# Altium PCB Teletupsud-PCB.PcbDoc
Units mm, origin at the board's own origin, x right, y up, seen from the top; angles counter-clockwise.
Board outline 47.5 x 47 mm, 4 copper layers (Top Layer, GND, GND2, Bottom Layer), stack 0.551 mm thick; 64 components, 51 nets, 259 pads, 138 vias.
Unrouted connection lines stored in the file: 9.
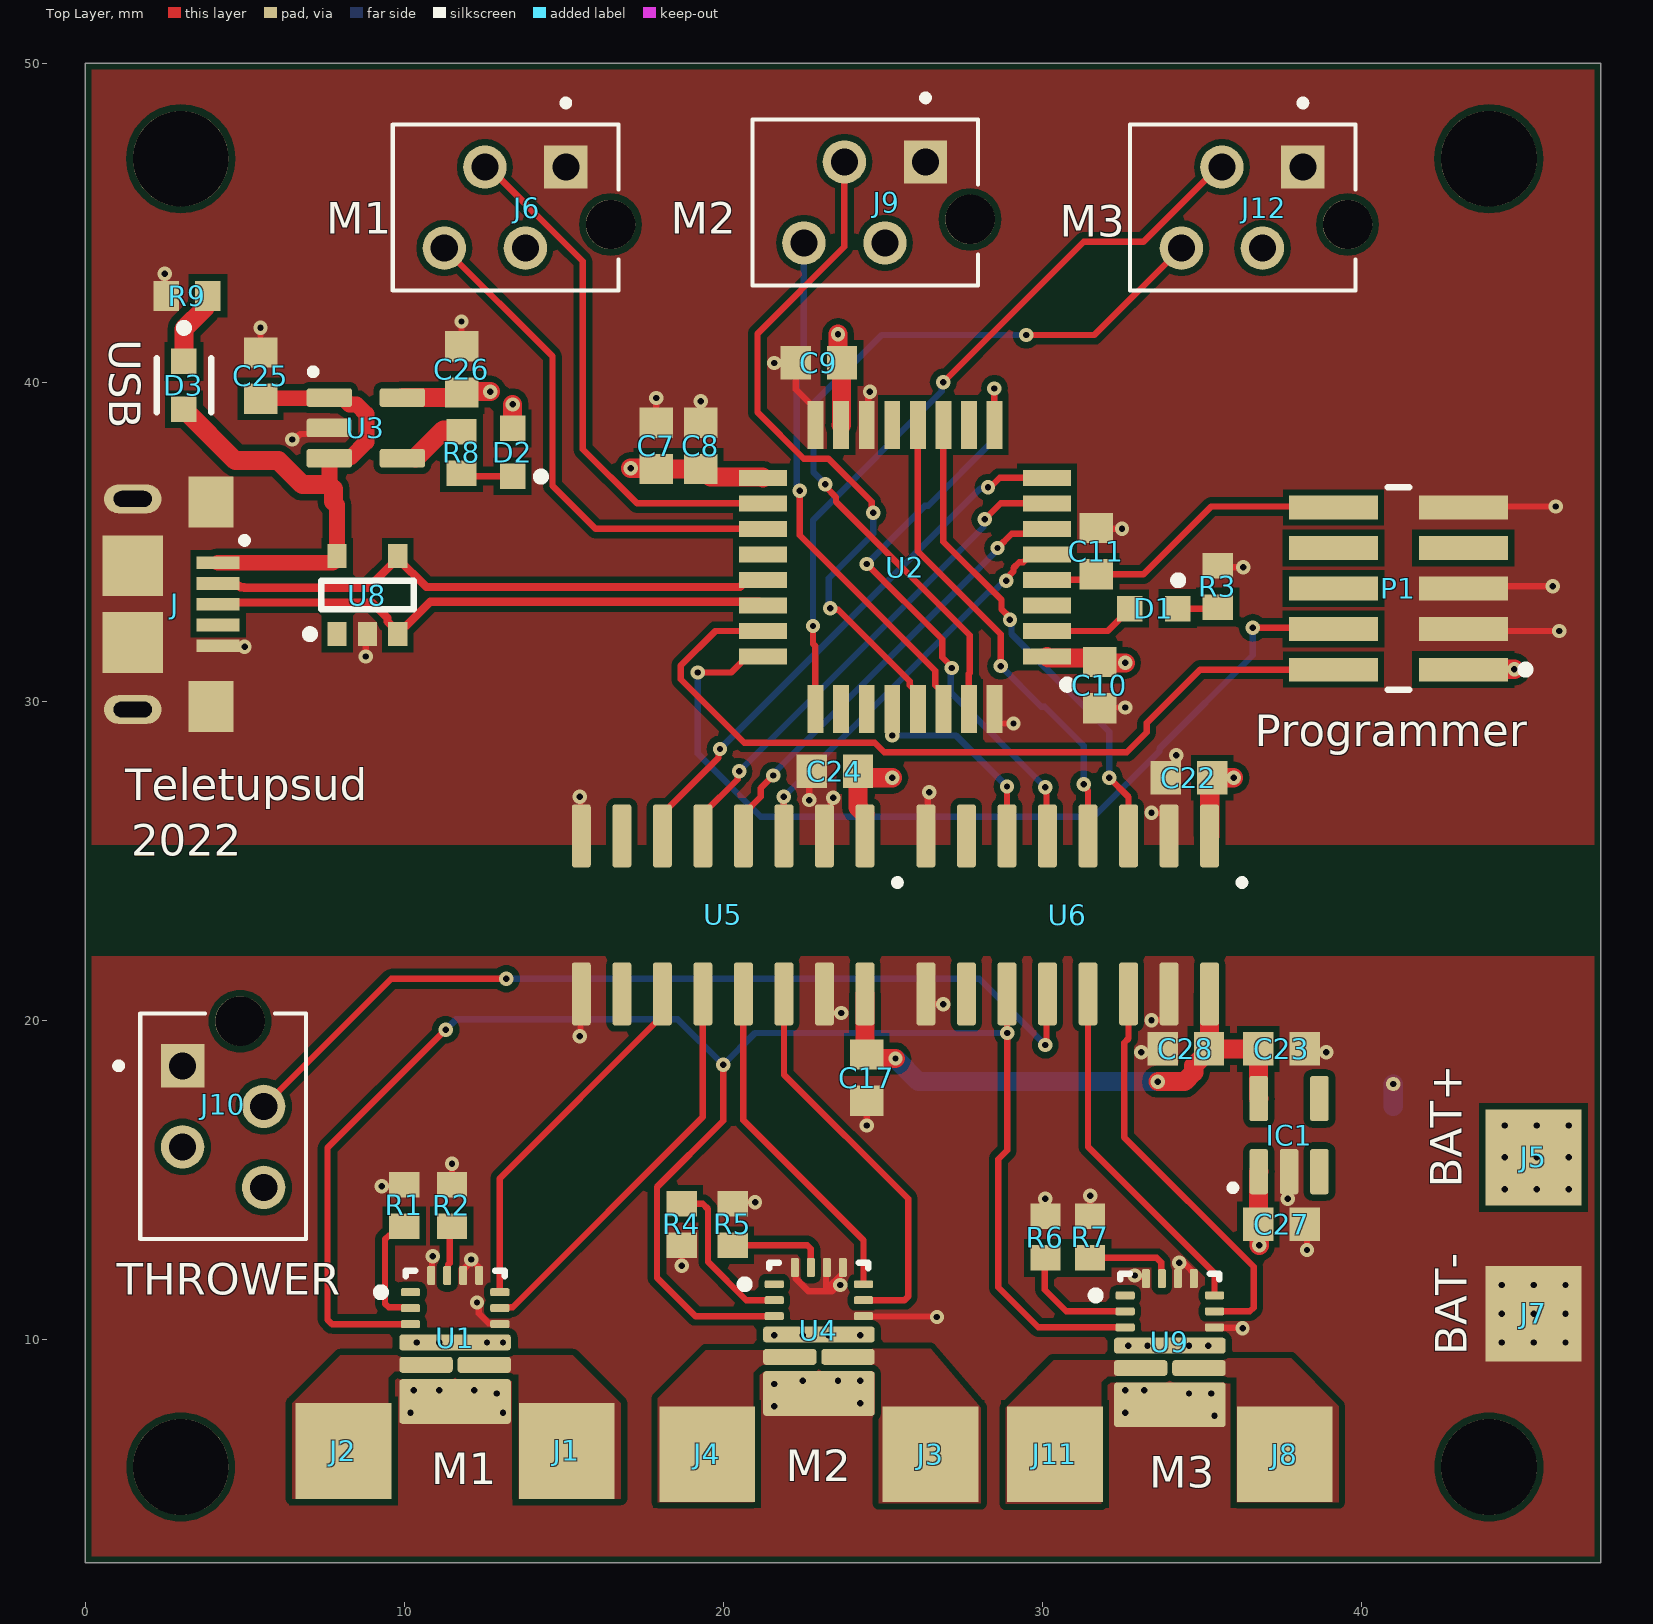
[diagram p0: Top Layer view]
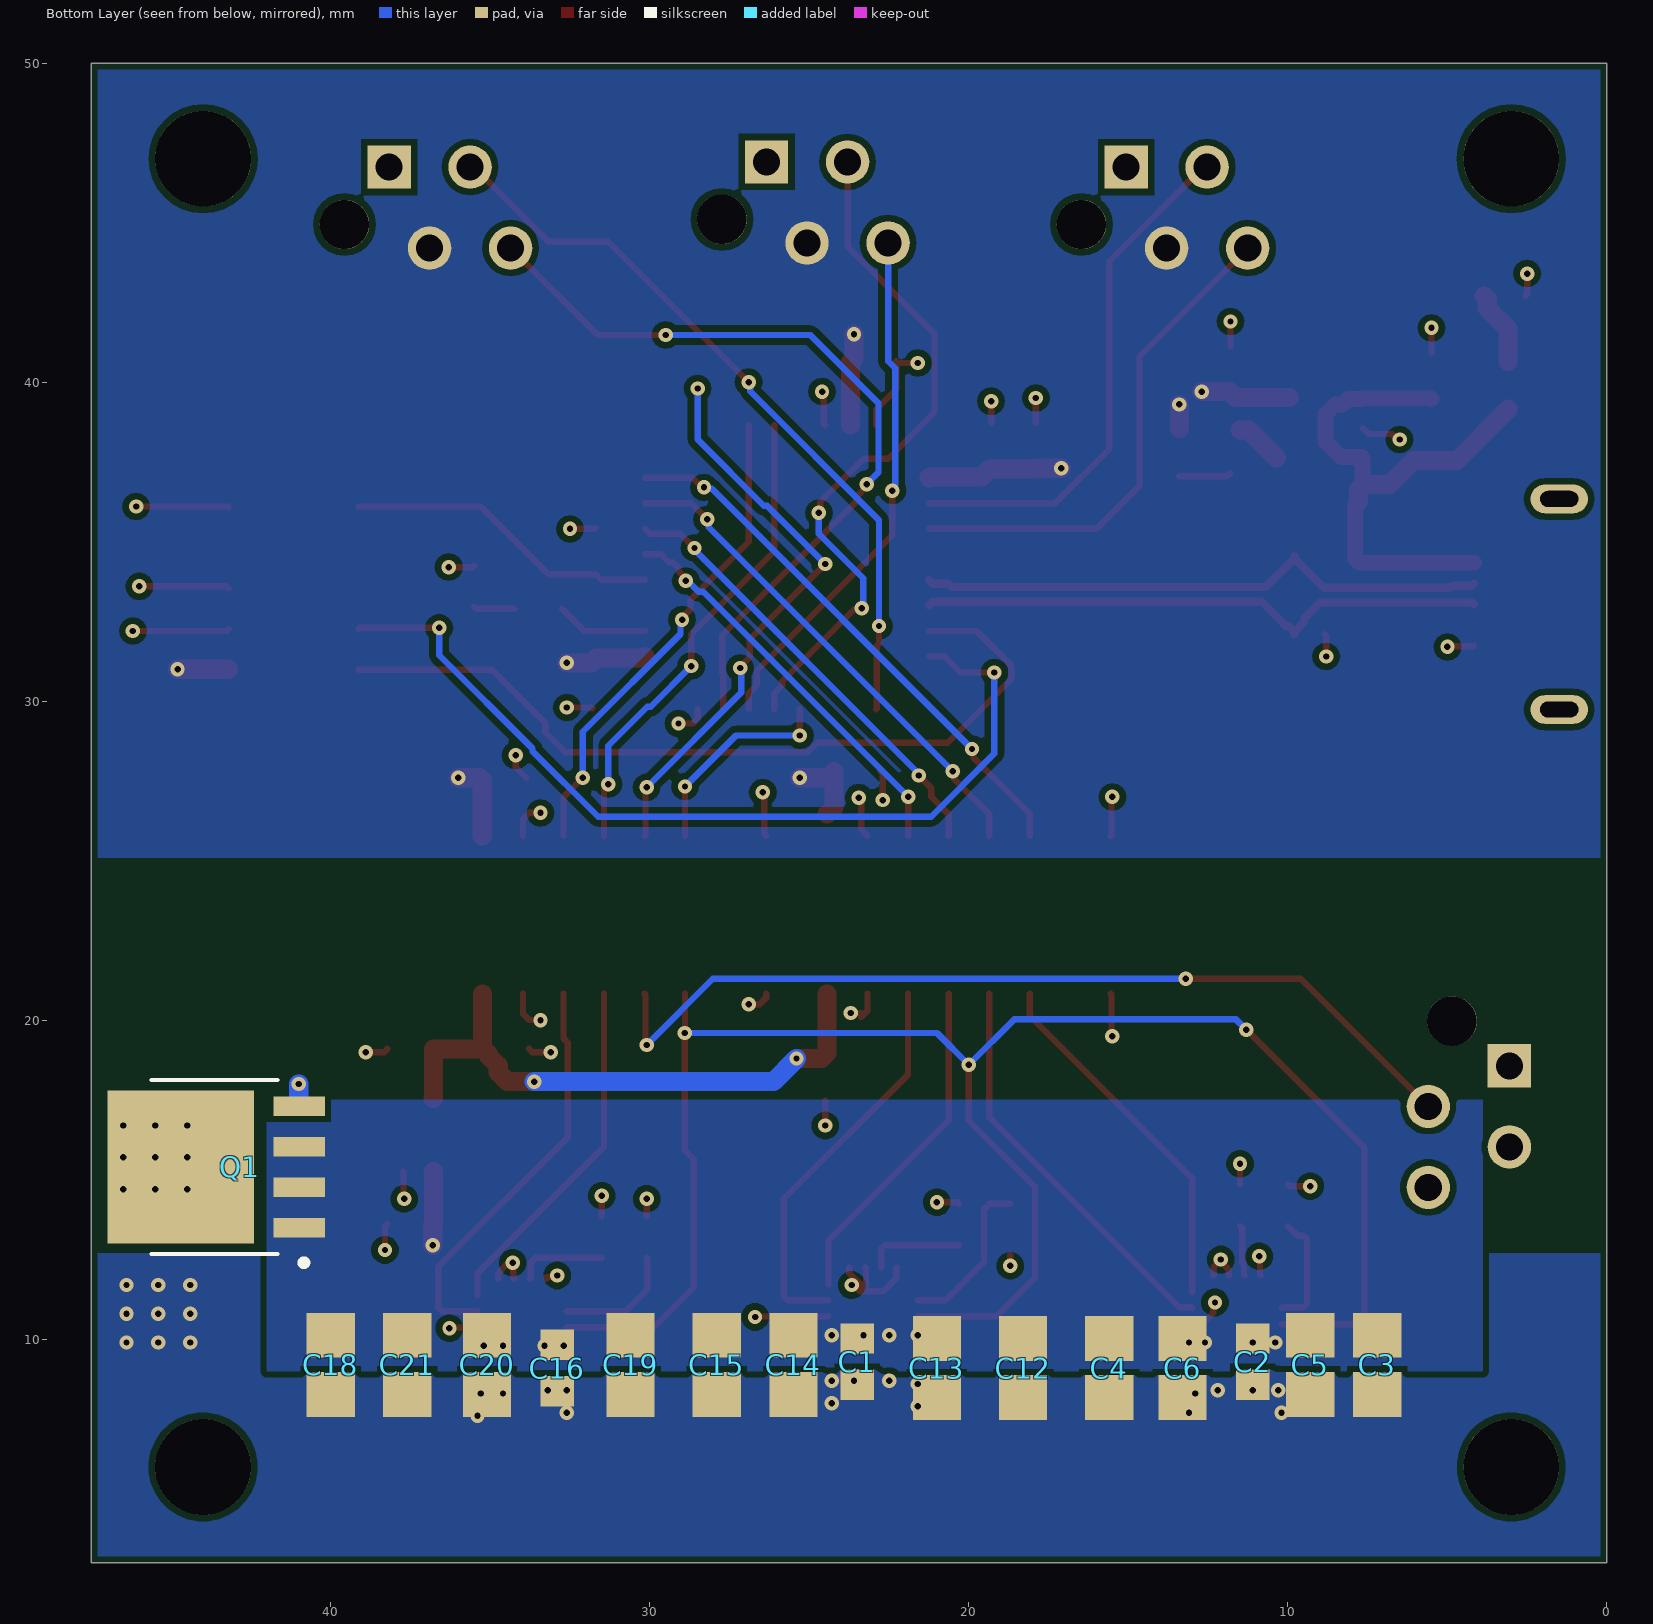
[diagram p1: Bottom Layer view, seen from below]
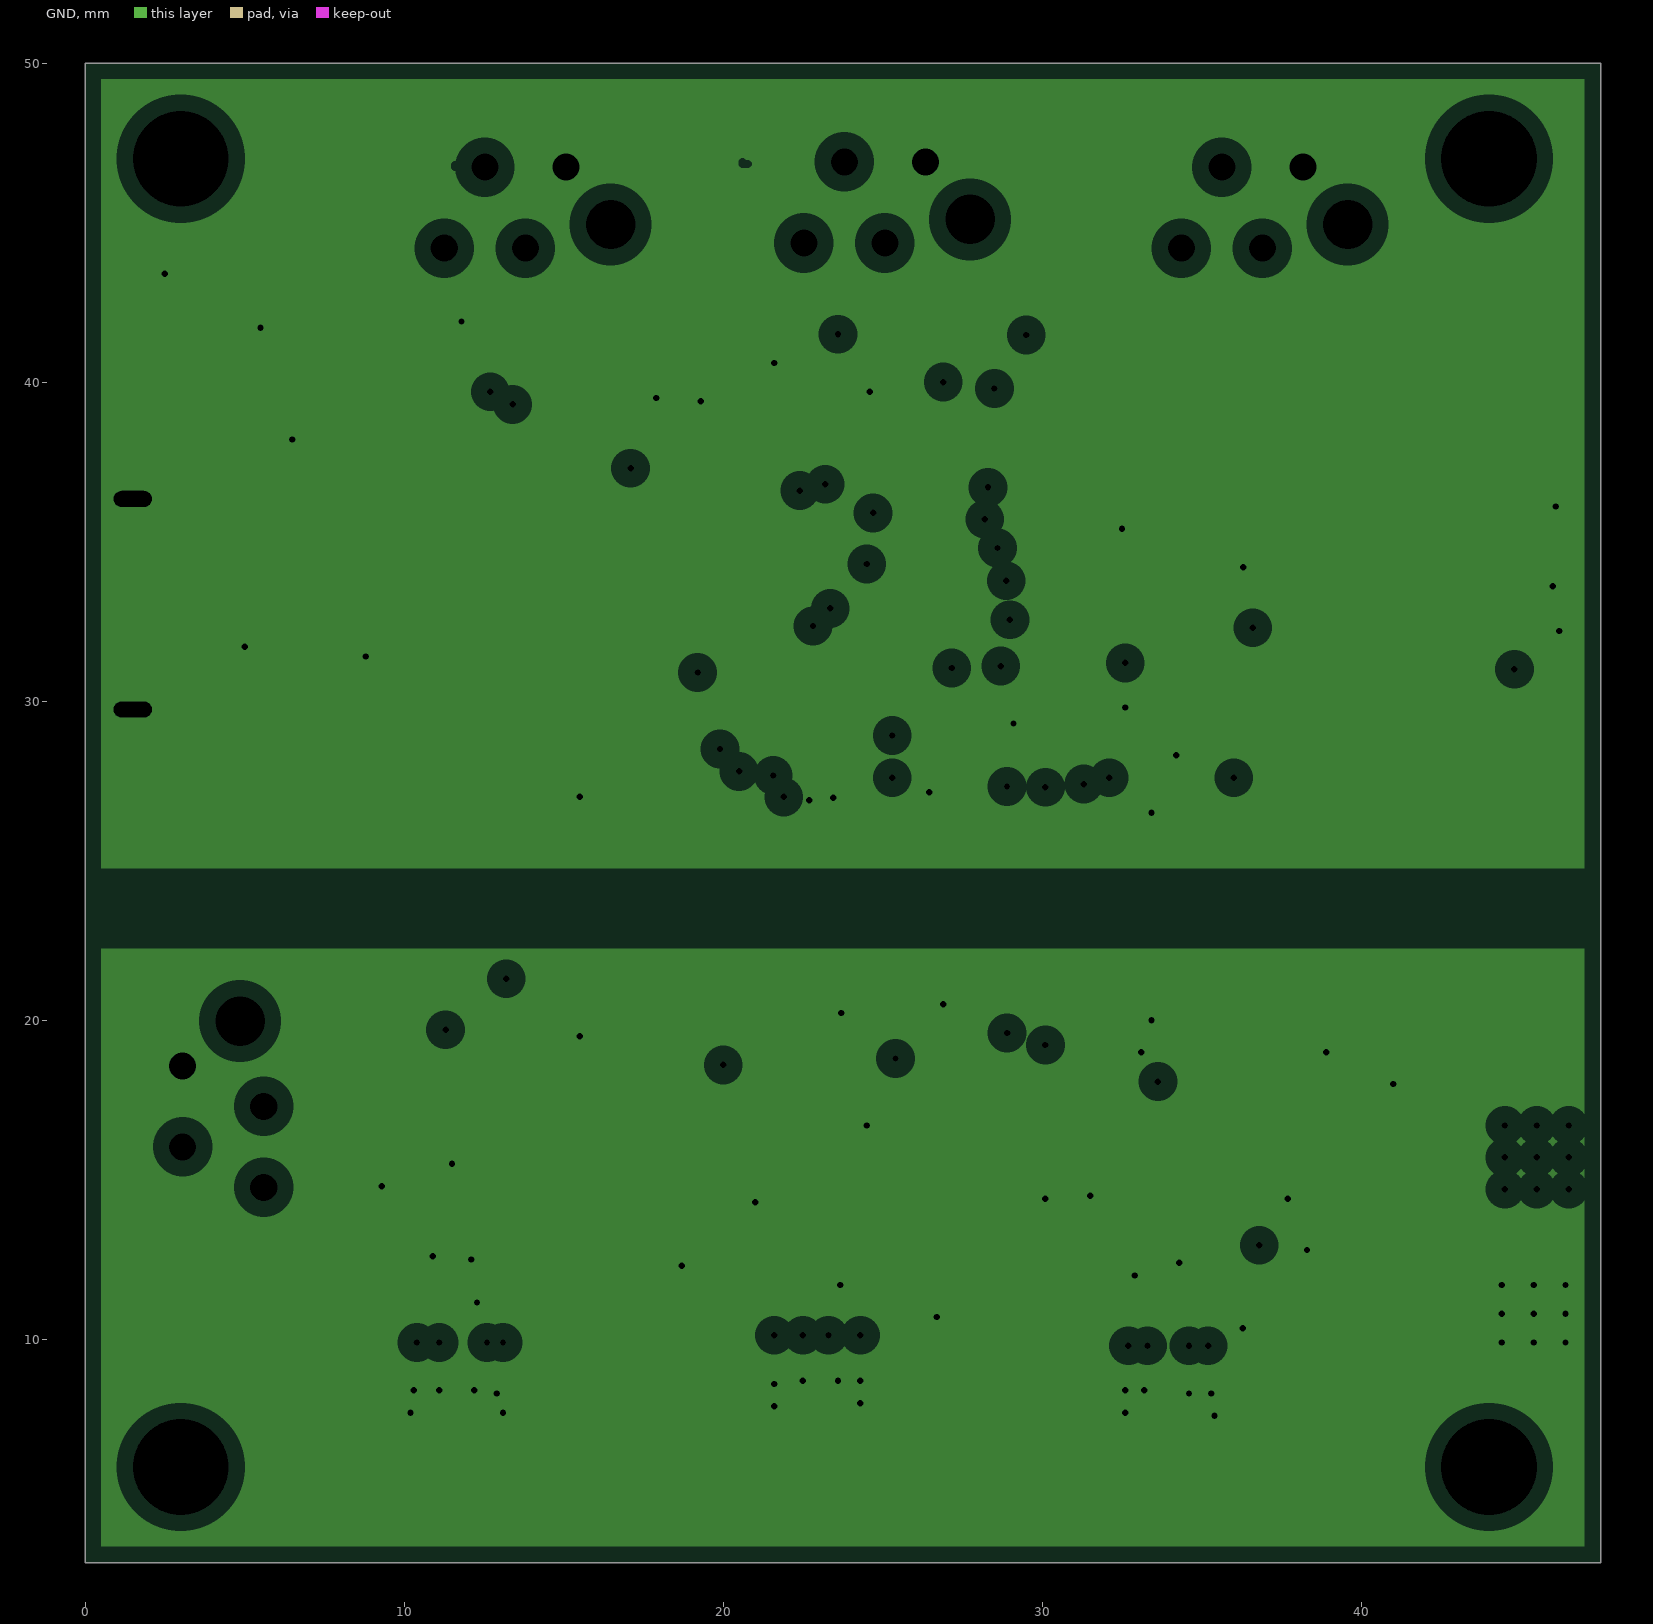
[diagram p2: GND, clearances drawn from the general rule]
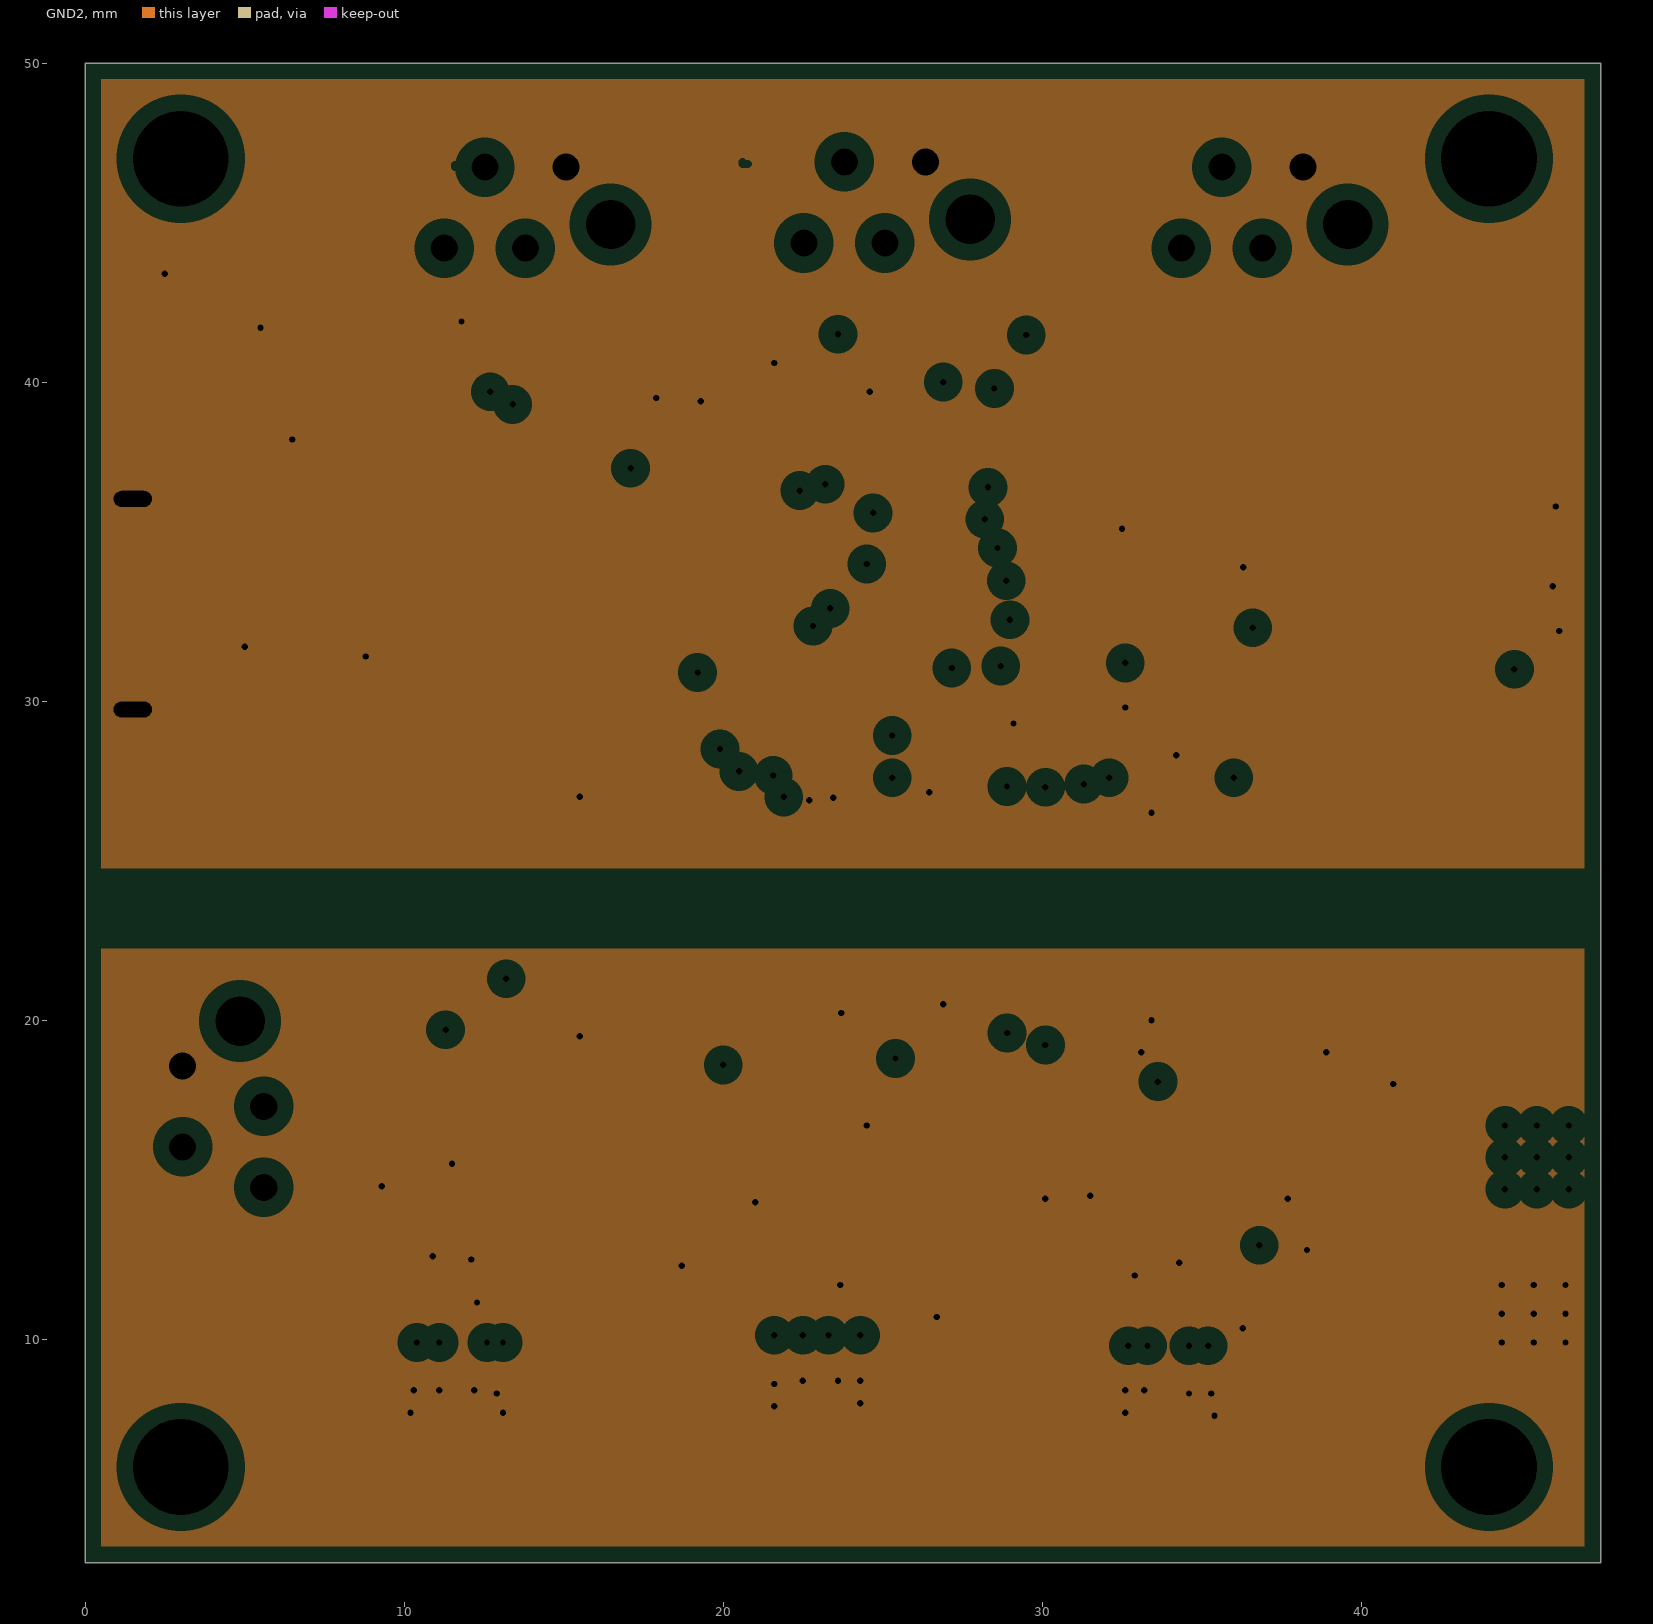
[diagram p3: GND2, clearances drawn from the general rule]
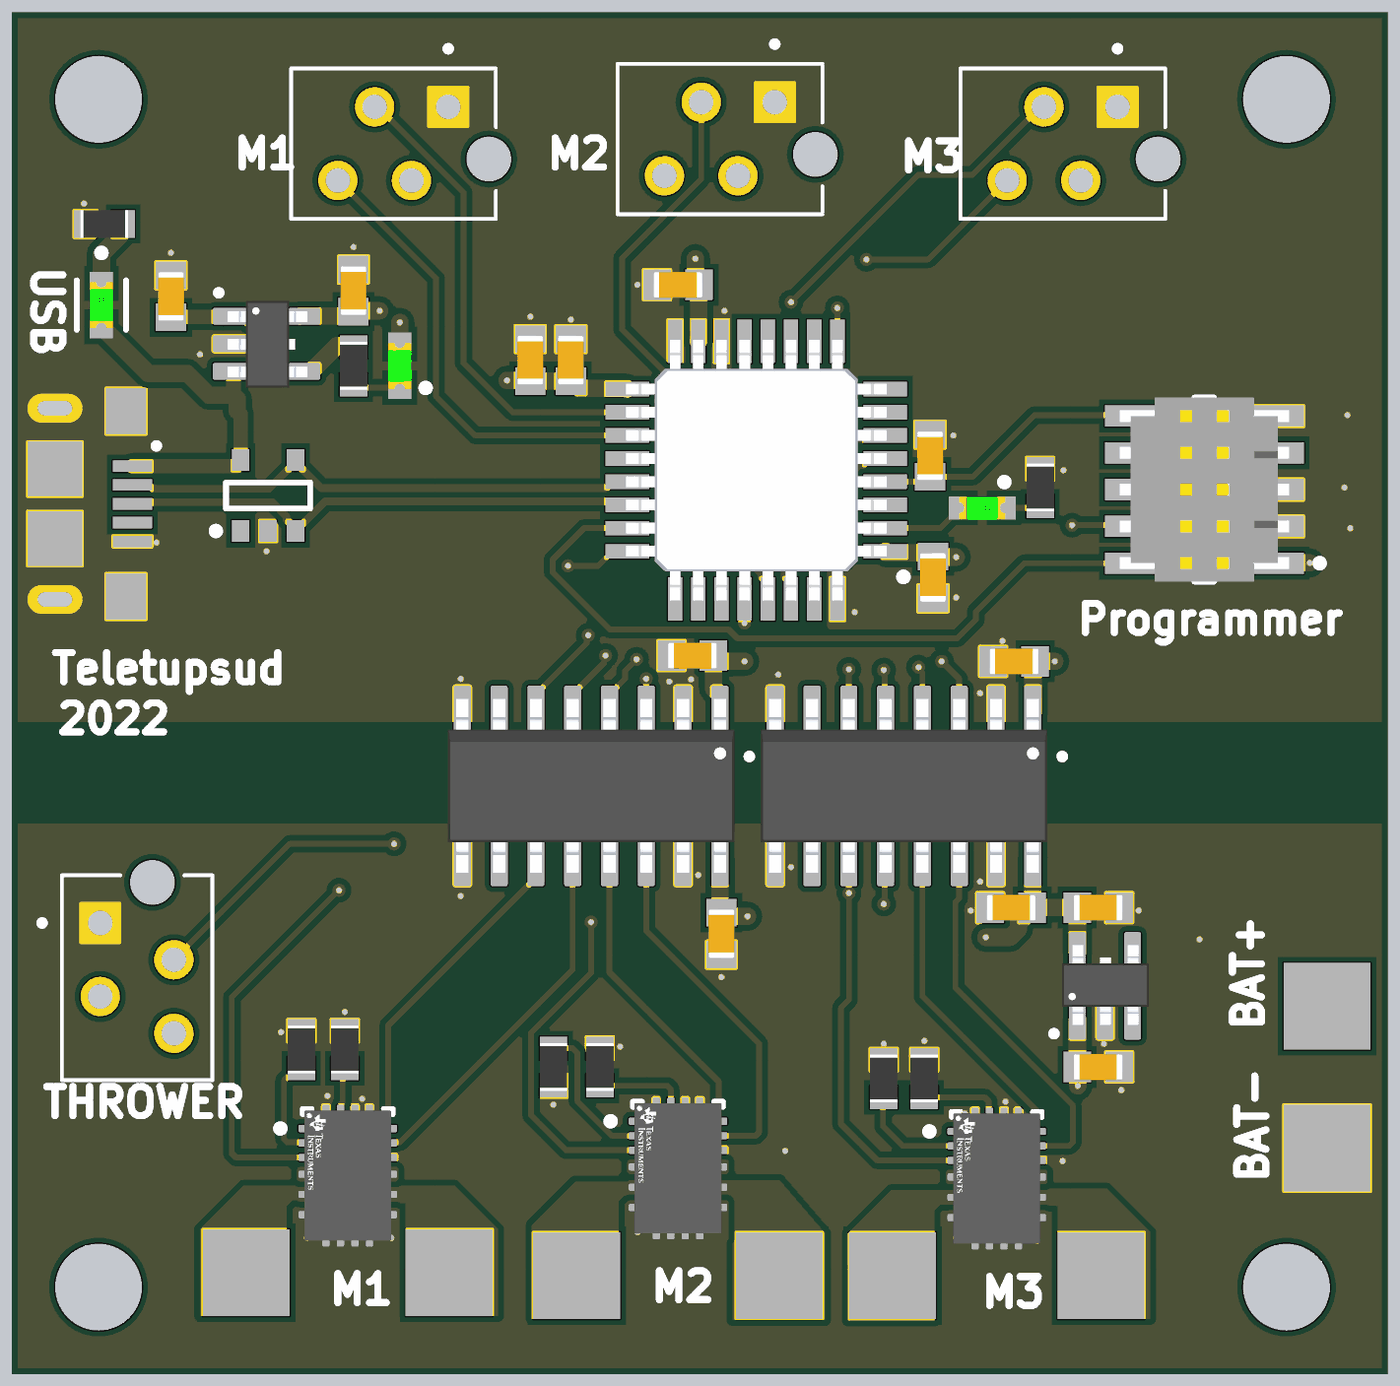
[diagram p4: 3D render of the assembled board from above, using the file's embedded part models]
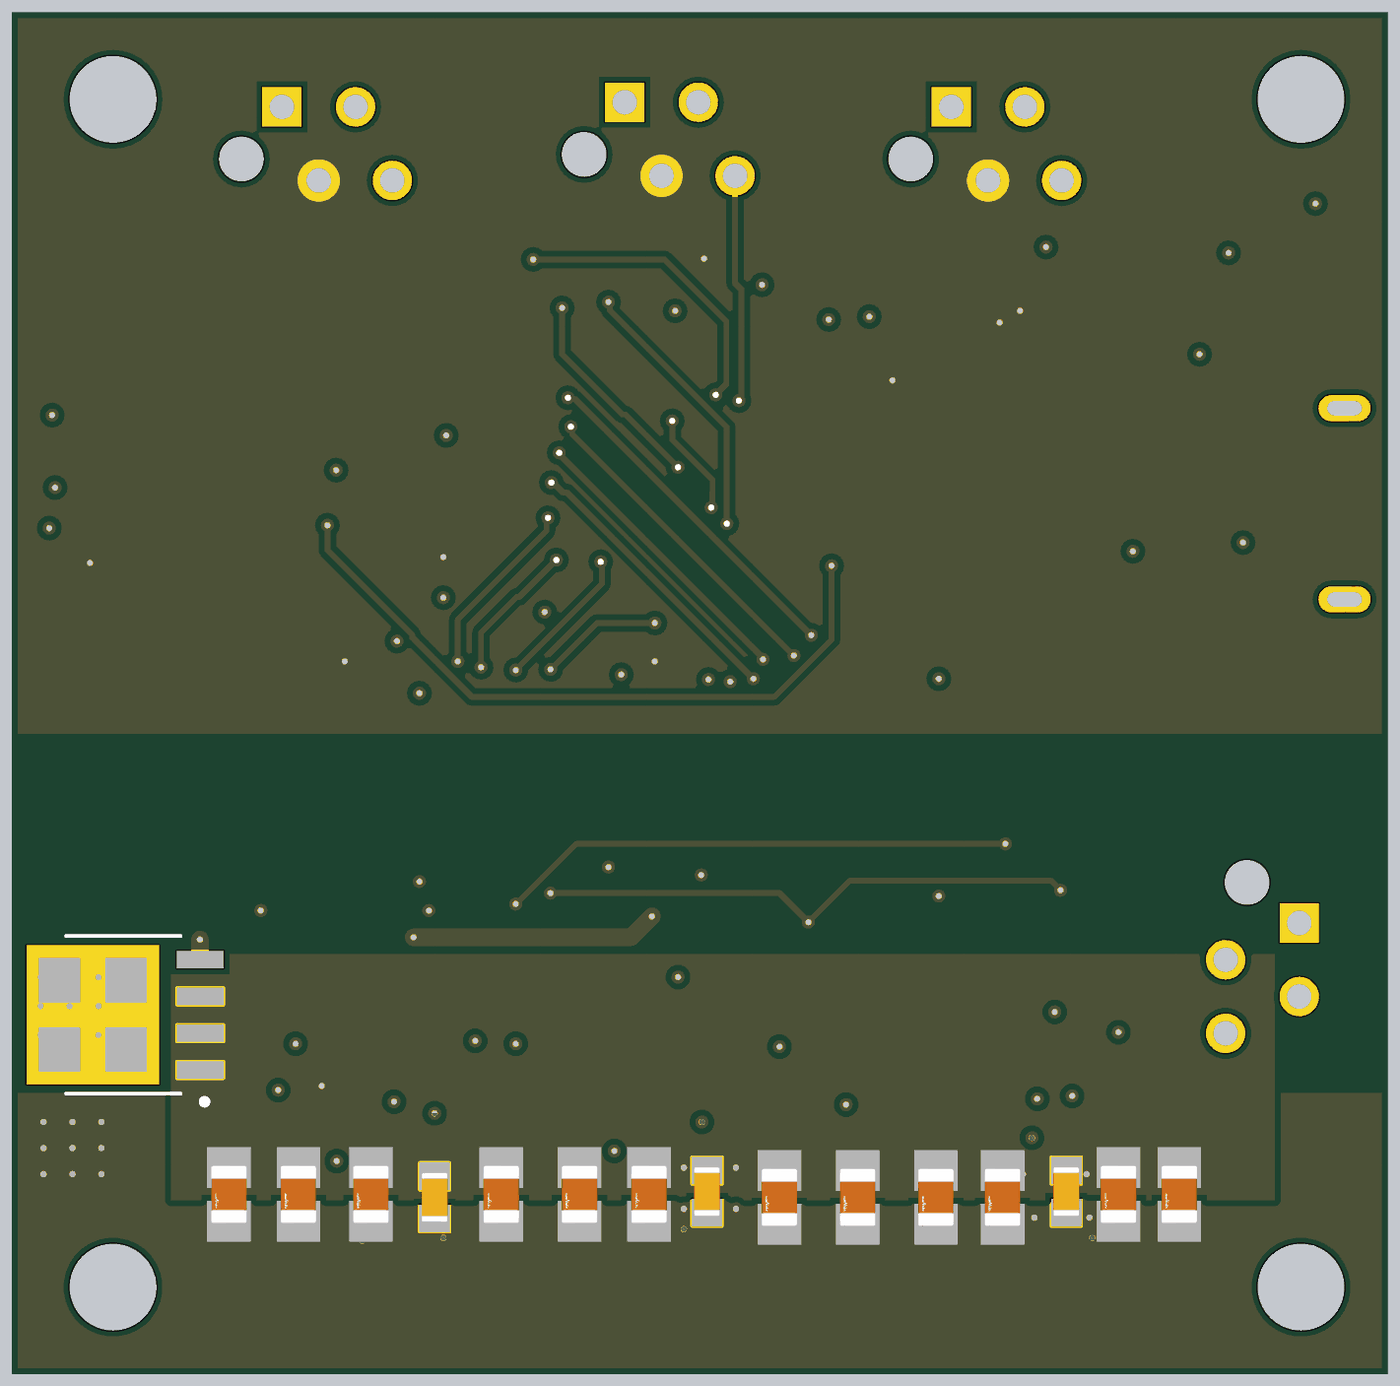
[diagram p5: 3D render of the assembled board from below, using the file's embedded part models]

## Layer stack, top to bottom
Top Solder: solder mask 0.0102, Solder Resist, Dk 3.5
Top Layer: signal copper 0.0356
Dielectric 2: prepreg 0.0711, PP-006, Dk 4.1
GND: plane copper 0.009, net (Multiple Nets)
Dielectric 1: dielectric 0.32, FR-4, Dk 4.8
GND2: plane copper 0.009, net (Multiple Nets)
Dielectric 3: prepreg 0.0711, PP-006, Dk 4.1
Bottom Layer: signal copper 0.0356
Bottom Solder: solder mask 0.0102, Solder Resist, Dk 3.5

## Board outline
0,3 47.5,3 47.5,50 0,50

## Design rules (kind name [scope] priority, off if disabled: settings)
BoardOutlineClearance [All] p1: gap=0.2 ignorepadtopadclearanceinfootprint=FALSE except(0: Arc-SplitContinuation Track-SplitContinuation SMDPad-SplitContinuation THPad-SplitContinuation Via-SplitContinuation Fill-SplitContinuation Poly-SplitContinuation Region-SplitContinuation Text-SplitContinuation)
Clearance [All] p1: gap=0.2 ignorepadtopadclearanceinfootprint=TRUE except(0: Arc-Hole Track-Hole SMDPad-Hole THPad-Hole Via-Hole Fill-Hole Poly-Hole Region-Hole Text-Hole)
ComponentClearance [All] p1: gap=0.1 collisioncheckmode=3 verticalgap=0.1 showdistances=FALSE
DiffPairsRouting DiffPairsRoutingUSB [All] p1: maxlimit=0.2 minlimit=0.2 mostfreqgap=0.2 toplayer_minwidth=0.15 toplayer_maxwidth=0.26 toplayer_prefwidth=0.26 bottomlayer_minwidth=0.15 bottomlayer_maxwidth=0.26 bottomlayer_prefwidth=0.26 maxuncoupledlength=12.7
DiffPairsRouting [All] p2: maxlimit=0.254 minlimit=0.254 mostfreqgap=0.254 toplayer_minwidth=0.381 toplayer_maxwidth=0.381 toplayer_prefwidth=0.381 bottomlayer_minwidth=0.381 bottomlayer_maxwidth=0.381 bottomlayer_prefwidth=0.381 maxuncoupledlength=12.7
HoleSize [All] p1: absolutevalues=TRUE maxlimit=5 minlimit=0.2 maxpercent=80.000 minpercent=20.000
MinimumSolderMaskSliver [All] p1: minsoldermaskwidth=0.1
PlaneClearance [All] p1: clearance=0.508
PlaneConnect [All] p1: planeconnectstyle=Direct reliefexpansion=0.508 reliefentries=4 reliefconductorwidth=0.254 reliefairgap=0.254
PolygonConnect [All] p1: connectstyle=Direct reliefconductorwidth=0.254 reliefentries=4 polygonreliefangle="90 Angle" airgapwidth=0.254
RoutingVias [All] p1: holewidth=0.2 width=0.45 viastyle="Through Hole" minholewidth=0.2 minwidth=0.45 maxholewidth=3 maxwidth=5
SilkToSilkClearance [All] p1: silktosilkclearance=0.2
SilkToSolderMaskClearance [All] p1: minsilkscreentomaskgap=0.2 clearancetoexposedcopper=TRUE
SolderMaskExpansion SolderMaskExpansionVia [IsVia] p1: expansion=0.102 istentingtop=TRUE
SolderMaskExpansion [All] p2: expansion=0.05 istentingtop=FALSE
Width [All] p1: maxlimit=3 minlimit=0.1 preferedwidth=0.254 minimp=50.000000 maximp=50.000000 favimp=50.000000
22 further rules are at their usual default settings.

## Classes and differential pairs
differential pair class USB: USB_D
differential pair USB_D: +USB_D_P -USB_D_N

## Components (designator, comment, footprint, x,y, rotation, side; value= is the part's Value field where it differs from the comment)
C1 "0.1uF" CAPC1608X90X35ML10T15 23.5,9.3 r90 bottom
C2 "0.1uF" CAPC1608X90X35ML10T15 11.1,9.3 r90 bottom
C3 "10uF" FP-GRM21B-0_15-IPC_A 7.2,9.2 r270 bottom
C4 "10uF" FP-GRM21B-0_15-IPC_A 15.6,9.1 r270 bottom
C5 "10uF" FP-GRM21B-0_15-IPC_A 9.3,9.2 r270 bottom
C6 "10uF" FP-GRM21B-0_15-IPC_A 13.3,9.1 r270 bottom
C7 "4.7uF" CAPC1608X90X35ML10T15 17.9,38 r270 top
C8 "100nF" CAPC1608X90X35ML10T15 19.3,38 r270 top
C9 "100nF" CAPC1608X90X35ML10T15 23,40.6 r0 top
C10 "100nF" CAPC1608X90X35ML10T15 31.8,30.5 r90 top
C11 "100nF" CAPC1608X90X35ML10T15 31.7,34.7 r270 top
C12 "10uF" FP-GRM21B-0_15-IPC_A 18.3,9.1 r270 bottom
C13 "10uF" FP-GRM21B-0_15-IPC_A 21,9.1 r270 bottom
C14 "10uF" FP-GRM21B-0_15-IPC_A 25.5,9.2 r270 bottom
C15 "10uF" FP-GRM21B-0_15-IPC_A 27.9,9.2 r270 bottom
C16 "0.1uF" CAPC1608X90X35ML10T15 32.9,9.1 r90 bottom
C17 "100nF" CAPC1608X90X35ML10T15 24.5,18.2 r90 top
C18 "10uF" FP-GRM21B-0_15-IPC_A 40,9.2 r270 bottom
C19 "10uF" FP-GRM21B-0_15-IPC_A 30.6,9.2 r270 bottom
C20 "10uF" FP-GRM21B-0_15-IPC_A 35.1,9.2 r270 bottom
C21 "10uF" FP-GRM21B-0_15-IPC_A 37.6,9.2 r270 bottom
C22 "100nF" CAPC1608X90X35ML10T15 34.6,27.6 r0 top
C23 "100nF" CAPC1608X90X35ML10T15 37.5,19.1 r180 top
C24 "100nF" CAPC1608X90X35ML10T15 23.5,27.8 r0 top
C25 "4.7uF" CAPC1608X90X35ML10T15 5.5,40.2 r270 top
C26 "4.7uF" CAPC1608X90X35ML10T15 11.8,40.4 r270 top
C27 "1uF" CAPC1608X90X35ML10T15 37.5,13.6 r180 top
C28 "1uF" CAPC1608X90X35ML10T15 34.5,19.1 r0 top
D1 "LTST-C190GKT" FP-LTST-C190GKT-MFG 33.5,32.9 r180 top
D2 "LTST-C190GKT" FP-LTST-C190GKT-MFG 13.4,37.8 r90 top
D3 "LTST-C190GKT" FP-LTST-C190GKT-MFG 3.1,39.9 r270 top
IC1 "NCV8730ASN500T1G" SOP95P275X110-5N 37.5,16.4 r90 top
J "10118193-0001LF" FCI_10118193-0001LF 1.496,33.039 r270 top
J1 "Current connection" "New footprint 1"#1 15.1,6.5 r0 top
J2 "Current connection" "New footprint 1"#1 8.1,6.5 r0 top
J3 "Current connection" "New footprint 1"#1 26.5,6.4 r0 top
J4 "Current connection" "New footprint 1"#1 19.5,6.4 r0 top
J5 "Current connection" "New footprint 1"#1 45.4,15.7 r90 top
J6 "7-215079-4" TE_7-215079-4 15.07,46.74 r0 top
J7 "Current connection" "New footprint 1"#1 45.4,10.8 r0 top
J8 "Current connection" "New footprint 1"#2 37.4,6.5 r0 top
J9 "7-215079-4" TE_7-215079-4 26.34,46.9 r0 top
J10 "7-215079-4" TE_7-215079-4 3.06,18.57 r90 top
J11 "Current connection" "New footprint 1"#1 30.4,6.4 r0 top
J12 "7-215079-4" TE_7-215079-4 38.17,46.74 r0 top
P1 "FTSH-105-01-L-DV-K" SMTC-FTSH-105-01-L-DV-K_V 41.165,33.53 r90 top
Q1 "BUK6Y10-30P" TO127P600X120-5N 43.64,15.4 r90 bottom
R1 "3.3K" RESC1609X50X30NL8T20 10,14.2 r270 top
R2 "100K" RESC1609X50X30NL8T20 11.5,14.2 r270 top
R3 "10K" RESC1609X50X30NL8T20 35.5,33.6 r270 top
R4 "3.3K" RESC1609X50X30NL8T20 18.7,13.6 r90 top
R5 "100K" RESC1609X50X30NL8T20 20.3,13.6 r270 top
R6 "3.3K" RESC1609X50X30NL8T20 30.1,13.2 r270 top
R7 "100K" RESC1609X50X30NL8T20 31.5,13.2 r270 top
R8 "3.3K" RESC1609X50X30NL8T20 11.8,37.8 r270 top
R9 "3.3K" RESC1609X50X30NL8T20 3.2,42.7 r180 top
U1 "DRV8243HQRXYRQ1" FP-RXY0014A-MFG 11.6,9.85 r0 top
U2 "STM32G441KBT6" QFP32_STM32 25.7,34.2 r90 top
U3 "NCP164CSN330T1G" SOP95P275X110-5N 8.8,38.8 r0 top
U4 "DRV8243HQRXYRQ1" FP-RXY0014A-MFG 23,10.1 r0 top
U5 "MAX14930DASE+T" SOIC127P600X175-16N 20,23.3 r270 top
U6 "MAX14930DASE+T" SOIC127P600X175-16N 30.8,23.3 r270 top
U8 "CM1223-02SO" ONSC-SOT23-5-527AH-01_L 8.85,33.325 r90 top
U9 "DRV8243HQRXYRQ1" FP-RXY0014A-MFG 34,9.75 r0 top

## Footprints (in the part's own frame and the unit in brackets; to place one, negate y for a bottom-side part, rotate by r counter-clockwise, add the part's x,y. Pads: shape width x height; smd on the part's side, far side on the other; paste and mask are expansions set on the pad)
CAPC1608X90X35ML10T15 [mm] "Chip Capacitor, 2-Leads, Body 1.7x0.9mm, IPC Low Density"
  rect 0.95x1.05 smd: 1(-0.725,0) 2(0.725,0)
  body extent -0.85,-0.45 0.85,0.45, height 0.9
FCI_10118193-0001LF [mm]
  rect 0.4x1.35 smd: 1(-1.3,2.675) 2(-0.65,2.675) 3(0,2.675) 4(0.65,2.675) 5(1.3,2.675)
  rect 1.6x1.4 smd: S1(-3.2,2.45) S2(3.2,2.45)
  rect 1.9x1.9 smd: S3(1.2,0) S4(-1.2,0)
  oval 0.9x1.8 hole 0.5 slot 1.2 at 90 deg: S5(-3.3,0) S6(3.3,0)
  silkscreen extent -2.1,3.4 -1.9,3.6
FP-GRM21B-0_15-IPC_A [mm]
  rect 1.406x1.508 smd paste+0 mask+0: 1(-0.926,0) 2(0.926,0)
  body extent -1,-0.63 1,0.63, height 1.4
FP-LTST-C190GKT-MFG [mm]
  rect 0.8x0.8 smd paste+0 mask+0: 1(-0.75,0) 2(0.75,0)
  silkscreen extent -0.89,-1.01 -0.64,-0.76, body extent -1.25,-0.55 1.25,0.55, height 0.25
FP-RXY0014A-MFG [mm]
  rrect40% 0.6x0.25 smd paste+0 mask-1000: 1(-1.4,1.625) 2(-1.4,1.125) 3(-1.4,0.625) 8(1.4,0.625) 9(1.4,1.125) 10(1.4,1.625)
  rrect40% 3.5x0.5 smd paste-1000 mask-1000: 4(0,0.05)
  rrect40% 1.675x0.5 smd paste-1000 mask-1000: 5(-0.913,-0.65) 7(0.913,-0.65)
  rrect14% 3.5x1.4 smd paste-1000 mask-1000: 6(0,-1.8)
  rrect40% 0.25x0.6 smd paste+0 mask-1000: 11(0.75,2.15) 12(0.25,2.15) 13(-0.25,2.15) 14(-0.75,2.15)
  silkscreen extent -2.45,1.5 1.55,2.3, body extent -1.85,-2.6 1.85,2.55, height 0.25
"New footprint 1"#1 [mm]
  rect 3x3 smd: 1(0,0)
"New footprint 1"#2 [mm]
  rect 3x3 smd: 1(0.2,-0.1)
ONSC-SOT23-5-527AH-01_L [mm] "SOT23, 5-Leads, Body 2.9x1.6mm, Pitch 0.95mm, IPC High Density"
  rect 0.75x0.6 smd: 1(-1.225,0.95) 2(-1.225,0) 3(-1.225,-0.95) 4(1.225,-0.95) 5(1.225,0.95)
  silkscreen extent -1.35,-1.45 0.45,1.92, body extent -0.8,-1.45 0.8,1.45, height 1.45
QFP32_STM32 [mm]
  rect 0.5x1.5 smd: 1(-2.8,-4.45) 2(-2,-4.45) 3(-1.2,-4.45) 4(-0.4,-4.45) 5(0.4,-4.45) 6(1.2,-4.45) 7(2,-4.45) 8(2.8,-4.45) 17(2.8,4.45) 18(2,4.45) 19(1.2,4.45) 20(0.4,4.45) 21(-0.4,4.45) 22(-1.2,4.45) 23(-2,4.45) 24(-2.8,4.45)
  rect 1.5x0.5 smd: 9(4.45,-2.8) 10(4.45,-2) 11(4.45,-1.2) 12(4.45,-0.4) 13(4.45,0.4) 14(4.45,1.2) 15(4.45,2) 16(4.45,2.8) 25(-4.45,2.8) 26(-4.45,2) 27(-4.45,1.2) 28(-4.45,0.4) 29(-4.45,-0.4) 30(-4.45,-1.2) 31(-4.45,-2) 32(-4.45,-2.8)
  silkscreen extent -3.81,-5.21 -3.56,-4.95, body extent -4.5,-4.5 4.5,4.5, height 1.59
RESC1609X50X30NL8T20 [mm] "Chip Resistor, 2-Leads, Body 1.65x0.95mm, IPC Medium Density"
  rect 0.8x0.95 smd: 1(-0.65,0) 2(0.65,0)
  body extent -0.82,-0.48 0.82,0.48, height 0.5
SMTC-FTSH-105-01-L-DV-K_V [mm] "CONN, 10-Leads, Body 6.35x3.43mm, Pitch 1.27mm"
  rect 0.74x2.79 smd: 1(-2.54,-2.035) 2(-2.54,2.035) 3(-1.27,-2.035) 4(-1.27,2.035) 5(0,-2.035) 6(0,2.035) 7(1.27,-2.035) 8(1.27,2.035) 9(2.54,-2.035) 10(2.54,2.035)
  silkscreen extent -3.17,-4.11 3.17,0.34, body extent -3.17,-2.92 3.18,2.92, height 6.12
SOIC127P600X175-16N [mm]
  rrect25% 1.97x0.59 smd: 1(-2.475,4.445) 2(-2.475,3.175) 3(-2.475,1.905) 4(-2.475,0.635) 5(-2.475,-0.635) 6(-2.475,-1.905) 7(-2.475,-3.175) 8(-2.475,-4.445) 9(2.475,-4.445) 10(2.475,-3.175) 11(2.475,-1.905) 12(2.475,-0.635) 13(2.475,0.635) 14(2.475,1.905) 15(2.475,3.175) 16(2.475,4.445)
  silkscreen extent -1.12,5.36 -0.92,5.56, body extent -3,-4.95 3,4.95, height 1.75
SOP95P275X110-5N [mm]
  rrect25% 1.42x0.58 smd: 1(-1.145,0.713) 2(-1.145,-0.238) 3(-1.145,-1.188) 4(1.145,-1.188) 5(1.145,0.712)
  silkscreen extent -1.75,1.42 -1.55,1.62, body extent -1.34,-1.75 1.41,1.25, height 1.1
TE_7-215079-4 [mm]
  rect 1.358x1.358 hole 0.85: 1(0,0)
  round 1.358 hole 0.85: 2(-1.27,-2.54) 3(-2.54,0) 4(-3.81,-2.54)
  round 1.55 hole 1.55 unplated: ""(1.4,-1.8)
  silkscreen extent -5.43,-3.87 1.65,2.11
TO127P600X120-5N [mm]
  rect 0.6x1.62 smd: 1(-1.905,-2.65) 2(-0.635,-2.65) 3(0.635,-2.65) 4(1.905,-2.65)
  rect 4.8x4.58 smd paste-3: 5(0,1.06)
  silkscreen extent -3.1,-2.9 2.72,1.97

## Part data
C1 C2 C7 C8 C9 C10 C11 C16 C17 C22 C23 C24 C25 C26 C27 C28: library part CMP-2000-04945-1, "Chip Capacitor, 22 pF, +/- 5%, 50 V, -55 to 125 degC, 0603 (1608 Metric), RoHS, Tape and Reel", Capacitance=22pF, Case Size/Dimension=0603, Dielectric=C0G, MANUFACTURER=Murata, Package Description="2-Pin Surface Mount Device, Body 1.6 x 0.8 mm", Package Reference=603, Rated Voltage=50V, Tolerance (%)=±5%, Datasheet URL=https://datasheet.ciiva.com/11786/0900766b807a1cab-11786398.pdf, Datasheet Version=Jul-06, Manufacturer URL=http://www.murata.com/
C3 C4 C5 C6 C12 C13 C14 C15 C18 C19 C20 C21: library part CMP-00007-1, "CAP CER 10UF 25V X5R 0805", Case Code (Imperial)=0805, Case Code (Metric)=2012, Dielectric=X5R, Max Operating Temperature=85°C, Min Operating Temperature=-55°C, Package Quantity=1, Tolerance=10%, Voltage=25V, Capacitance=10uF, Case/Package=0805, Construction=Flat, Depth=1.25mm, Height=1.25mm, Lead Free="Lead Free", Length=2mm, Material=Ceramic, Mount="Surface Mount", Packaging="Tape and Reel", Radiation Hardening=No, Reach SVHC Compliant=Yes, RoHS Compliant=Yes, Series=GRM, Termination=SMD/SMT, Thickness=0.053inch, Voltage Rating=25V, Voltage Rating (DC)=25V, Width=0.049inch
D1 D2: library part CMP-00006-1, "LED Uni-Color Green 565nm 2-Pin Chip LED T/R", Case Code (Imperial)=0603, Case Code (Metric)=1608, Color=Green, Forward Current=30mA, Forward Voltage=2.1V, Lens Color=Colorless, Max Operating Temperature=85°C, Min Operating Temperature=-55°C, Package Quantity=1, Power Dissipation=100mW, Reverse Voltage=5V, Test Current=10mA, Voltage=2V, Case/Package=0603, Depth=0.8mm, Dominant Wavelength=569nm, Height=0.9mm, Illumination Color=Green, Lead Free="Lead Free", Length=1.6mm, Lens Size=0.8mm, Lens Style=Flat,Diffused,Colorless,Rectangular,Clear, Lens Transparency=Clear, Luminous Intensity=6mcd, Mount="Surface Mount", Number of Elements=1, Number of LEDs=1, Number of Pins=2, Packaging="Tape and Reel", Power Rating=100mW, Radiation Hardening=No, RoHS Compliant=Yes, Series=-, Viewing Angle=130°, Wavelength=565nm, Width=0.8mm
D3: library part CMP-22017-000005-2, "LED GREEN CLEAR CHIP SMD", Case Code (Imperial)=0603, Case Code (Metric)=1608, Color=Green, Forward Current=30mA, Forward Voltage=2.1V, Lens Color=Colorless, Max Operating Temperature=85°C, Min Operating Temperature=-55°C, Package Quantity=1, Power Dissipation=100mW, Reverse Voltage=5V, Test Current=10mA, Voltage=2V, Case/Package=0603, Depth=0.8mm, Dominant Wavelength=569nm, Height=0.8mm, Illumination Color=Green, Lead Free="Lead Free", Length=1.6mm, Lens Style=Clear, Lens Transparency=Clear, Luminous Intensity=6mcd, Mount="Surface Mount", Number of Elements=1, Number of LEDs=1, Number of Pins=2, Packaging="Tape and Reel", Power Rating=100mW, Radiation Hardening=No, Viewing Angle=130°, Wavelength=565nm, Width=0.8mm
IC1: library part CMP-00000-4
J: library part CMP-005-000000-4, "USB - micro B USB 2.0 Receptacle Connector 5 Position Surface Mount, Right Angle; Through Hole", Package=None, Availability=Unavailable, Component Type=Standard, Design Item ID=10118193-0001LF, MF="Amphenol ICC", MP=10118193-0001LF, Pin Count=11, Price=None, SnapEDA_Link=https://www.snapeda.com/parts/10118193-0001LF/Amphenol%20FCI/view-part/2758989/?ref=snap, Source=SnapEDAsch.SchLib
J1 J2 J3 J4 J5 J7 J8 J11: library part CMP-00009-2
J6 J9 J10 J12: library part CMP-003-000000-1, "Micro-MaTch 4 Position 1.27 mm Pitch Vertical Female-on-Board Connector", Package=SMD-6, Availability=Unavailable, Component Type=Standard, Design Item ID=7-215079-4, MF="TE Connectivity", MP=7-215079-4, Pin Count=4, Price=None, SnapEDA_Link=https://www.snapeda.com/parts/7-215079-4/TE%20Connectivity%20AMP%20Connectors/view-part/453401/?ref=snap, Source=7-215079-4.SchLib
P1: library part CMP-2000-05353-1, "Male Header, Pitch 1.27 mm, 2 x 5 Position, Height 6.25 mm", Color=Black, MANUFACTURER=Samtec, Package Description="Male Header, Pitch 1.27 mm, 2 x 5 Position, Height 5.97 mm, Tail Length 4.32 mm", Standard Package=1, Category=Connectors,Interconnects, Connector Type=Header,Unshrouded, Contact Finish=Gold, Contact Finish Thickness=10µin(0.25µm), Contact Mating Length="0.120\"(3.05mm)", Contact Type=MalePin, Datasheet URL=http://suddendocs.samtec.com/prints/ftsh-1xx-xx-xxx-dv-xxx-mkt.pdf, Datasheet Version="Rev. ET, 10/1995", Family=RectangularConnectors-Headers,MalePins, Manufacturer URL=http://www.samtec.com/, Mating Products="SFMC-105-L2-S-D-TR-ND / -CONN.05\"SURFACE10POSSMT / FLE-105-01-G-DV-TR-ND / -CONNSKT1.27MM10POSDUALSMD / FLE-105-01-G-DV-A-P-ND / -CONNSKT1.27MM10POSDUALSMD / FLE-105-01-G-DV-A-ND / -CONNSKT1.27MM10POSDUALSMD / CLP-105-02-G-D-P-TR-ND / -CONNRCPT10POSDUAL.05\"SMD / SAM1155-05-ND / -CONNRCPT10POSDUAL.05\"SMD / SAM1154-05-ND / -CONNRCPT10POSDUAL.05\"SMD / SAM1153-05-ND / -CONNRCPT10POSDUAL.05\"SMD / SAM1226-05-ND / -CONNRCPT.05\"10POSDUALSMD", Mounting Type=SurfaceMount, Number of Positions=10, Number of Positions Loaded=All, Number of Rows=2, Other Names=Q3937619, Package Reference=FTSH-105-01-L-DV-K, Package URL=http://suddendocs.samtec.com/prints/ftsh-1xx-xx-xxx-dv-xxx-footprint.pdf, Packaging=Tube, Pitch="0.050\"(1.27mm)", Product Training Modules=Board-to-BoardConnectors, Row Spacing="0.050\"(1.27mm)", Series=FTSH, Termination=Solder
Q1: library part CMP-00003-1
R1 R2 R3 R4 R5 R6 R7 R8 R9: library part CMP-2000-03816-5, "Chip Resistor, 0 Ohm, Jumper, 100 mW, -55 to 155 degC, 0603 (1608 Metric), RoHS, Tape and Reel", MANUFACTURER="Vishay Semiconductor", Max Operating Temperature="155 degC", Min Operating Temperature="-55 degC", Package Quantity=5000, Voltage Rating="75 V", ComponentLink1Description="Manufacturer URL", ComponentLink1URL=http://www.vishay.com/, ComponentLink2Description=Datasheet, ComponentLink2URL=http://www.vishay.com/docs/20035/dcrcwe3.pdf, DatasheetVersion=06/2012, Height="0.45 mm", Length="1.55 mm", Mount="Surface Mount", Mounting Technology="Surface Mount", PackageDescription="2-Pin Surface Mount Device, Body 1.575 x 0.85 mm", PackageReference=0603, Packaging="Tape and Reel", Pins=2, REACH SVHC=Unknown, RoHSCompliant=true
U1 U4 U9: library part CMP-00004-1, "Automotive 40-V, 12-A H-Bridge driver with integrated current sensing and feedback 14-VQFN-HR -40 to 125"
U2: library part CMP-00001-4
U3: library part CMP-00002-4
U5 U6: library part CMP-00005-3, "Digital Isolator, 4Ch, -40 To 125Deg C Rohs Compliant: Yes", Case/Package=SOIC, Isolated Power=No, Max Operating Temperature=125°C, Min Operating Temperature=-40°C, Channel Type=Unidirectional, Data Rate=1Mbps, Number of Channels=4, Packaging=Rail/Tube, Propagation Delay=55.3ns, Pulse Width Distortion (PWD)=4.5ns, RoHS Compliant=Yes, Series=-, Type="General Purpose"
U8: library part CMP-1063-00173-1, "Industry First Low Capacitance ESD Protection Arrays with Backdrive Protection, 5-Pin SOT-23, Pb-Free, Tape and Reel", MANUFACTURER="On Semiconductor", C Max (pF)=1.5, Code_JEDEC=MO-178, ComponentLink1Description="Manufacturer URL", ComponentLink1URL=http://www.onsemi.com/, ComponentLink2Description=Datasheet, ComponentLink2URL=http://www.onsemi.com/pub_link/Collateral/CM1223-D.PDF, ComponentLink3Description="Package Specification", ComponentLink3URL=http://www.onsemi.com/pub_link/Collateral/527AH.PDF, DatasheetVersion="Rev. 6", Direction=Unidirectional, Mounting Technology="Surface Mount", Number of Lines=2, PackageDescription="5-Pin Small Outline Transistor, Body 2.9 x 1.6 mm, Pitch 0.95 mm", PackageReference=SOT23-5-527AH-01, PackageVersion="Rev. O, 12/2008", Packing="Tape and Reel", PartNumber=CM1223-02SO, PPK Max (W)=0.225, RoHS=Pb-Free

## Free pads (board coordinates)
  round 3 hole 3 unplated: M(3,6) M(3,47) M(44,6) M(44,47)

## Via types
v1: diameter 0.45, hole 0.2, Top Layer to Bottom Layer, tented both sides, 138 vias

## Nets (pads, with @x,y where several pads share a name; then routed paths per layer and width w, separated by ;. In a path a pad name is that pad's centre, name@x,y a point inside that pad or via, vN(x,y) a via of type N, cw(c..) or ccw(c..) an arc to the next point about the centre after c; other vN are vias at no path point)
+3V3: C7.2 C8.2 C9.2 C10.2 C22.2 C24.2 C26.2 D2.2 J6.2 J9.2 J12.2 P1.1 U2.1 U2.15 U2.17 U3.5 U5.1 U6.1 | length 20.1
  Top Layer w0.6: U3.5 9.955,39.522 11.647,39.522 C26.2 11.825,39.7 v1(12.7,39.7) ; D2.2 v1(13.4,39.3) ; v1(17.1,37.3) 17.875,37.3 C7.2 C8.2@19.35,37.275 ; C8.2 C8.2@19.35,37.275 ; U2.17 21.225,37.025 19.6,37.025 C8.2@19.35,37.275 ; v1(23.6,41.5) 23.6,40.725 C9.2 23.713,40.588 23.713,38.663 U2.15 ; C24.2@24.225,27.775 24.4,27.6 v1(25.3,27.6) ; C24.2 24.225,26.675 U5.1@24.44,26.46 ; U2.1 30.2,31.35 31.675,31.35 31.825,31.2 v1(32.6,31.2) ; U6.1 35.25,25.78 35.25,27.525 C22.2 v1(36,27.6) ; P1.1 43.21,31 v1(44.8,31)
+5: C17.2 C23.2 C28.2 IC1.5 U5.16 U6.16 | length 18.4
  Top Layer w0.6: U5.16 24.45,20.82 24.45,18.975 24.625,18.8 v1(25.4,18.8) ; v1(33.625,18.075) 34.457,18.075 34.75,18.368 34.75,18.575 35.05,18.875 35.05,18.925 C28.2 ; U6.16 35.24,20.82 35.24,19.115 C28.2 ; IC1.5 36.781,17.551 36.781,19.094 C23.2 C28.2
  Bottom Layer w0.6: v1(25.4,18.8) 26.125,18.075 v1(33.625,18.075)
+5_USB: C25.2 D3.2 J.1 U3.1 U3.3 U8.5 | length 18.3
  Top Layer w0.5: J.1 7.764,34.339 7.9,34.475 7.9,36.142 7.787,36.255 ; C25.2 5.519,39.494 7.674,39.494 7.695,39.473 8.115,39.473 8.285,39.302 8.509,39.302 8.815,38.996 8.815,38.129 8.339,37.653 7.695,37.653 U3.3 7.655,36.787 7.787,36.655
  Top Layer w0.6: D3.2 4.711,37.539 6.064,37.539 6.815,36.787 7.655,36.787 ; 7.787,36.255 7.787,36.655
+16V: C1.2 C2.2 C3.1 C4.1 C5.1 C6.1 C12.1 C13.1 C14.1 C15.1 C16.2 C18.1 C19.1 C20.1 C21.1 C27.2 IC1.1 Q1.1 Q1.2 Q1.3 U1.4 U4.4 U9.4 | length 2.3
  Top Layer w0.6: IC1.1 36.781,15.249 36.781,13.606 C27.2 36.8,13.575 v1(36.8,12.949)
  other v1: 32.7,9.8 33.3,9.8 34.6,9.8 35.2,9.8 10.4,9.9 11.1,9.9 12.6,9.9 13.1,9.9 21.6,10.125 22.5,10.125 23.3,10.125 24.3,10.125
GND: C7.1 C8.1 C9.1 C10.1 C11.1 C22.1 C24.1 C25.1 C26.1 J6.1 J9.1 J12.1 J.5 J.S1 J.S2 J.S3 J.S4 J.S5 J.S6 P1.3 P1.5 P1.9 R3.1 R9.2 U2.14 U2.16 U2.32 U3.2 U5.2 U5.8 U6.2 U6.8 U8.2 | length 29.7
  Top Layer w0.2: v1(2.5,43.4) 2.5,42.75 R9.2 ; J.5 4.191,31.719 4.981,31.719 v1(5,31.7) ; C25.1 v1(5.5,41.7) ; v1(6.5,38.2) 6.568,38.2 6.74,38.373 7.465,38.373 U3.2 ; v1(8.8,31.4) 8.8,32.05 U8.2 ; C26.1 v1(11.8,41.9) ; v1(15.5,27) 15.528,26.972 15.528,25.802 U5.8 ; C7.1 v1(17.9,39.5) ; C8.1 v1(19.3,39.4) ; v1(21.6,40.6) 22.225,40.6 22.275,40.65 22.275,39.775 22.467,39.583 22.9,39.15 U2.16 ; v1(22.7,26.9) 22.7,27.725 C24.1 ; U5.2 23.37,25.97 23.37,26.827 23.449,26.907 v1(23.449,26.974) ; U2.14 24.552,38.702 24.552,39.652 v1(24.6,39.7) ; U6.8 26.41,25.83 26.41,27.094 v1(26.458,27.142) ; U2.32 28.5,29.45 28.65,29.3 v1(29.1,29.3) ; C11.1 31.725,35.4 v1(32.5,35.4) ; C10.1 31.825,29.8 v1(32.6,29.8) ; v1(33.425,26.5) 33.78,26.5 33.975,26.305 U6.2 ; C22.1 34.2,27.925 v1(34.2,28.3) ; R3.1 35.55,34.2 v1(36.3,34.2) ; P1.3 43.26,32.2 v1(46.2,32.2) ; P1.5 43.27,33.6 v1(46,33.6) ; P1.9 43.23,36.1 v1(46.1,36.1)
M1_ENC_1: J6.3 U2.18 | length 16.5
  Top Layer w0.2: J6.3 12.645,46.74 15.6,43.785 15.6,37.9 17.3,36.2 U2.18
M1_ENC_2: J6.4 U2.19 | length 16
  Top Layer w0.2: J6.4 14.65,40.81 14.65,36.75 16,35.4 U2.19
M1_PWM1: U2.7 U5.5 | length 15.7
  Top Layer w0.2: U5.5 19.365,26.465 20.452,27.552 20.452,27.752 v1(20.5,27.8) ; v1(28.2,35.7) 28.7,36.2 U2.7
  Bottom Layer w0.2: v1(20.5,27.8) 28.152,35.452 28.152,35.652 v1(28.2,35.7)
M1_PWM2: U2.8 U5.6 | length 17.2
  Top Layer w0.2: U5.6 18.095,26.465 19.852,28.222 19.852,28.452 v1(19.9,28.5) ; v1(28.3,36.7) 28.368,36.7 28.668,37 U2.8
  Bottom Layer w0.2: v1(19.9,28.5) 28.052,36.652 28.252,36.652 v1(28.3,36.7)
M1_PWM_1O: U1.9 U5.12 | length 12.7
  Top Layer w0.2: U1.9 13.025,11 13.4,11 19.365,16.965 U5.12
M1_PWM_2O: U1.10 U5.11 | length 11.5
  Top Layer w0.2: U1.10 13,15.04 18.095,20.135 U5.11
M2_ENC_1: J9.3 U2.29 | length 22.1
  Top Layer w0.2: v1(23.356,32.908) 23.398,32.866 23.608,32.866 25.85,30.624 25.85,30.5 26.1,30.25 U2.29 ; J9.3 23.8,44.245 21.075,41.52 21.075,39.051 22.526,37.6 23.301,37.6 24.652,36.249 24.652,35.948 v1(24.7,35.9)
  Bottom Layer w0.2: v1(23.356,32.908) 23.312,32.952 23.312,33.433 23.308,33.437 23.308,33.85 24.7,35.242 v1(24.7,35.9)
M2_ENC_2: J9.4 U2.30 | length 16.6
  Top Layer w0.2: v1(22.398,36.6) 22.398,35.202 26.65,30.95 26.65,30.5 26.9,30.25 U2.30
  Bottom Layer w0.2: v1(22.398,36.6) 22.398,36.668 22.308,36.758 22.308,40.43 22.53,40.653 J9.4
M2_PWM1: U2.5 U5.3 | length 12.7
  Top Layer w0.2: v1(21.9,27) 21.902,26.997 21.902,25.778 U5.3 ; v1(28.871,33.771) 28.871,33.839 29.1,34.068 29.1,34.174 29.276,34.35 29.4,34.35 29.65,34.6 U2.5
  Bottom Layer w0.2: v1(21.9,27) 28.329,33.429 28.471,33.429 28.813,33.771 v1(28.871,33.771)
M2_PWM2: U2.6 U5.4 | length 14.1
  Top Layer w0.2: U5.4 20.635,26.465 21.176,27.006 21.176,27.276 v1(21.57,27.67) ; v1(28.6,34.8) 29.05,35.25 30,35.25 U2.6
  Bottom Layer w0.2: v1(21.57,27.67) 21.57,27.72 28.6,34.75 v1(28.6,34.8)
M2_PWM_1O: U4.9 U5.14 | length 12.5
  Top Layer w0.2: U5.14 21.905,18.295 25.8,14.4 25.8,11.342 25.683,11.225 U4.9
M2_PWM_2O: U4.10 U5.13 | length 10.7
  Top Layer w0.2: U5.13 20.635,16.865 24.4,13.1 U4.10
M3_ENC_1: J12.3 U2.25 | length 23.6
  Top Layer w0.2: v1(22.817,32.355) 22.817,31.803 22.889,31.73 22.889,29.761 U2.25 ; v1(26.9,40) 31.3,44.4 33.175,44.4 35.515,46.74 J12.3
  Bottom Layer w0.2: v1(22.817,32.355) 22.817,35.675 26.852,39.71 26.852,39.952 v1(26.9,40) ; J12.3@35.515,46.74 J12.3
M3_ENC_2: J12.4 U2.31 | length 25.2
  Top Layer w0.2: v1(23.2,36.8) 23.2,36.732 23.537,36.396 23.537,36.253 27.725,32.065 27.725,30.883 27.7,30.858 U2.31 ; v1(29.5,41.475) 31.635,41.475 J12.4
  Bottom Layer w0.2: v1(23.2,36.8) 23.2,36.808 22.833,37.175 22.833,39.333 24.975,41.475 v1(29.5,41.475)
M3_PWM1: U2.11 U6.3 | length 15.3
  Top Layer w0.2: U2.11 26.9,35 28.725,33.175 28.725,32.885 28.988,32.622 v1(28.988,32.554) ; v1(32.1,27.6) 32.705,26.995 U6.3
  Bottom Layer w0.2: v1(28.988,32.554) 29.036,32.507 29.036,32.107 32.1,29.042 v1(32.1,27.6)
M3_PWM2: U2.12 U6.4 | length 15.1
  Top Layer w0.2: U2.12 26.1,34.7 28.7,32.1 v1(28.7,31.1) ; v1(31.3,27.4) 31.3,27.332 31.435,27.197 U6.4
  Bottom Layer w0.2: v1(28.7,31.1) 29.974,29.826 30.074,29.826 31.3,28.6 v1(31.3,27.4)
M3_PWM_1O: U6.14 U9.9 | length 12.8
  Top Layer w0.2: U6.14 32.705,19.426 32.575,19.296 32.575,16.325 36.625,12.275 36.625,10.992 36.508,10.875 U9.9
M3_PWM_2O: U6.13 U9.10 | length 11.1
  Top Layer w0.2: U6.13 31.435,16.035 35.4,12.07 U9.10
NetD1_1: D1.1 R3.2 | length 1.3
  Top Layer w0.2: D1.1 35.45,32.9 R3.2
NetD1_2: D1.2 U2.2 | length 2.9
  Top Layer w0.2: U2.2 32.05,32.2 D1.2
NetD2_1: D2.1 R8.2 | length 1.6
  Top Layer w0.2: R8.2 11.9,37.05 D2.1
NetD3_1: D3.1 R9.1 | length 2.4
  Top Layer w0.6: D3.1 3.1,41.668 3.75,42.318 3.75,42.6 R9.1
NetJ1_1: J1.1 U1.7
NetJ2_1: J2.1 U1.5
NetJ3_1: J3.1 U4.7
NetJ4_1: J4.1 U4.5
NetJ5_1: J5.1 Q1.5
  other v1: 44.5,14.7 45.5,14.7 46.5,14.7 44.5,15.7 45.5,15.7 46.5,15.7 44.5,16.7 45.5,16.7 46.5,16.7
NetJ8_1: J8.1 U9.7
NetJ11_1: J11.1 U9.5
NetR1_2: R1.2 U1.2 | length 3.6
  Top Layer w0.2: R1.2 9.7,13.25 9.517,13.25 9.4,13.133 9.4,11.117 9.517,11 10.175,11 U1.2
NetR2_2: R2.2 U1.13 | length 1.6
  Top Layer w0.2: U1.13 11.375,12.025 11.375,12.333 11.425,12.383 11.425,13.475 R2.2
NetR4_2: R4.2 U4.2 | length 5.1
  Top Layer w0.2: R4.2 19.358,14.25 19.525,14.083 19.525,12.426 20.726,11.225 U4.2
NetR5_2: R5.2 U4.13 | length 3.1
  Top Layer w0.2: R5.2 22.633,12.95 22.75,12.833 U4.13
NetR6_2: R6.2 U9.2 | length 3.8
  Top Layer w0.2: R6.2 30.075,12.525 30.075,11.55 30.75,10.875 U9.2
NetR7_2: R7.2 U9.13 | length 2.8
  Top Layer w0.2: R7.2 33.586,12.55 33.725,12.411 33.725,11.925 U9.13
NetR8_1: R8.1 U3.4 | length 1.5
  Top Layer w0.6: U3.4@10.355,37.623 11.232,38.5 R8.1@11.5,38.5
NRST: C11.2 P1.10 U2.4 | length 9.9
  Top Layer w0.2: U2.4 31.525,33.8 C11.2 33.175,33.975 35.3,36.1 39.1,36.1 P1.10
NSLEEP: U2.28 U6.6 | length 6.6
  Top Layer w0.2: v1(25.298,28.925) 25.299,28.926 25.299,29.749 U2.28 ; U6.6 v1(28.896,27.325)
  Bottom Layer w0.2: v1(25.298,28.925) 27.296,28.925 v1(28.896,27.325)
NSLEEP_OUT: U1.3 U4.3 U6.11 U9.3 | length 57.5
  Top Layer w0.2: U1.3 7.742,10.475 7.6,10.617 7.6,16 v1(11.3,19.7) ; v1(20,18.6) 20,16.849 17.925,14.774 17.925,11.933 19.133,10.725 U4.3 ; U6.11 28.897,20.823 28.897,19.603 v1(28.9,19.6) 28.9,15.923 28.625,15.648 28.625,11.626 29.876,10.375 U9.3
  Bottom Layer w0.2: v1(11.3,19.7) 11.625,20.025 18.575,20.025 v1(20,18.6) 21,19.6 v1(28.9,19.6)
PGND: C1.1 C2.1 C3.2 C4.2 C5.2 C6.2 C12.2 C13.2 C14.2 C15.2 C16.1 C17.1 C18.2 C19.2 C20.2 C21.2 C23.1 C27.1 C28.1 IC1.2 J7.1 J10.1 Q1.4 R1.1 R2.1 R4.1 R5.1 R6.1 R7.1 U1.6 U1.8 U1.11 U1.12 U1.14 U4.6 U4.8 U4.11 U4.12 U4.14 U5.9 U5.15 U6.9 U6.15 U9.6 U9.8 U9.11 U9.12 U9.14 | length 25.1
  Top Layer w0.2: v1(9.3,14.8) 9.95,14.8 R1.1 ; U1.14 10.875,12.025 10.875,12.575 v1(10.9,12.6) ; R2.1 v1(11.5,15.5) ; U1.12 11.85,12.175 11.925,12.25 11.925,12.257 12.1,12.432 v1(12.1,12.5) 12.325,12.275 12.325,12.025 U1.11 ; v1(12.287,11.154) 12.334,11.106 12.334,10.821 12.655,10.5 12.975,10.5 U1.8 ; v1(15.5,19.5) 15.528,19.527 15.528,20.797 U5.9 ; v1(18.7,12.3) R4.1@18.7,12.65 ; R5.1 20.35,14.3 v1(21,14.3) ; U4.14 22.275,12.225 22.275,11.905 22.68,11.5 23.2,11.5 ; U5.15 23.175,20.295 23.37,20.1 23.37,20.225 v1(23.7,20.225) ; U4.12 23.225,12.225 23.225,11.55 ; v1(23.675,11.7) 23.607,11.7 23.407,11.5 23.2,11.5 ; U4.11 23.75,12.075 23.225,11.55 ; U4.8 24.412,10.713 26.687,10.713 v1(26.7,10.7) ; v1(24.5,16.7) C17.1 ; U6.9 26.355,20.695 26.55,20.5 v1(26.9,20.5) ; R6.1 v1(30.1,14.4) ; R7.1 v1(31.5,14.5) ; v1(32.9,12) 32.948,11.952 33.225,11.952 33.25,11.927 U9.14 ; v1(33.1,19) 33.675,19 C28.1 ; v1(33.425,20) 33.432,20.007 33.78,20.007 33.975,20.202 U6.15 ; U9.12 34.275,11.925 34.275,12.284 34.271,12.288 34.271,12.4 34.275,12.396 34.441,12.396 34.675,12.162 34.675,12.15 34.75,12.075 U9.11 ; U9.8 35.412,10.363 36.267,10.363 v1(36.279,10.35) ; v1(37.7,14.4) 37.719,14.419 37.719,15.236 IC1.2 ; C27.1 38.3,13.525 v1(38.3,12.8) ; C23.1 38.325,19 v1(38.9,19) ; 23.2,11.5 23.2,11.525 23.225,11.55
  Top Layer w0.254: U4.6@23.7,8.775 24.225,8.775 v1(24.3,8.7)
  Bottom Layer w0.6: Q1.4 41,17.305 v1(41,18)
  other v1: 35.4,7.6 10.2,7.7 13.1,7.7 32.6,7.7 21.6,7.9 24.3,8 12.9,8.3 34.6,8.3 35.3,8.3 10.3,8.4 11.1,8.4 12.2,8.4 32.6,8.4 33.2,8.4 21.6,8.6 22.5,8.7 23.6,8.7 44.4,9.9 45.4,9.9 46.4,9.9 44.4,10.8 45.4,10.8 46.4,10.8 44.4,11.7 45.4,11.7 46.4,11.7 34.3,12.4
SWCLK: P1.4 U2.24 | length 28.6
  Top Layer w0.2: v1(19.2,30.9) 20.25,30.9 20.75,31.4 U2.24 ; v1(36.6,32.3) 39.09,32.3 P1.4
  Bottom Layer w0.2: v1(19.2,30.9) 19.2,28.358 21.183,26.375 31.617,26.375 33.675,28.433 33.675,28.517 36.6,31.442 v1(36.6,32.3)
SWDIO: P1.2 U2.23 | length 26.1
  Top Layer w0.2: U2.23 19.758,32.2 18.675,31.117 18.675,30.683 20.658,28.7 24.749,28.7 25.049,28.4 32.649,28.4 33.275,29.026 33.275,29.317 34.948,30.99 P1.2
THROWER_OUT: J10.2 U6.12 | length 28.6
  Top Layer w0.2: J10.2 9.6,21.3 v1(13.2,21.3) ; v1(30.1,19.225) 30.133,19.258 30.133,20.793 U6.12
  Bottom Layer w0.2: v1(13.2,21.3) 28.025,21.3 v1(30.1,19.225)
THROWER_PWM: U2.9 U6.5 | length 19.3
  Top Layer w0.2: v1(24.5,34.3) 26.862,31.938 26.862,31.381 27.168,31.076 v1(27.168,31.038) ; U2.9 v1(28.5,39.8) ; v1(30.1,27.3) 30.133,27.267 30.133,25.807 U6.5
  Bottom Layer w0.2: v1(24.5,34.3) 26.324,36.124 26.424,36.124 28.5,38.2 v1(28.5,39.8) ; v1(27.168,31.038) 27.129,30.999 27.129,30.271 v1(30.1,27.3)
USB_D_N: J.2 U2.21 U8.4 | length 18.1
  Top Layer w0.26: J.2 4.241,33.619 4.819,33.619 4.869,33.569 4.983,33.569 4.997,33.555 8.88,33.555 U8.4@9.8,34.475 ; U8.4 U8.4@9.8,34.475 ; U2.21 21.13,33.68 20.63,33.68 20.53,33.58 10.695,33.58 U8.4@9.8,34.475
USB_D_P: J.3 U2.22 U8.3 | length 18.1
  Top Layer w0.26: J.3 4.228,33.095 8.997,33.095 9.48,32.612 9.48,32.495 U8.3@9.8,32.175 ; U8.3 U8.3@9.8,32.175 ; U2.22 21.13,33.12 10.82,33.12 10.045,32.345 9.97,32.345 U8.3@9.8,32.175
pads on no net: IC1.3 IC1.4 J6. J9. J10. J10.3 J10.4 J12. J.4 P1.6 P1.7 P1.8 U1.1 U2.3 U2.10 U2.13 U2.20 U2.26 U2.27 U4.1 U5.7 U5.10 U6.7 U6.10 U8.1 U9.1

## Polygon pours and split planes (outlines as drawn)
+3V3 on Bottom Layer "GND-BOT" (solid, remove dead copper, pour order 1): 0,25.1 0,50.6 47.5,50.6 47.5,25.1
PGND on Bottom Layer "PGND_L04_P017" (solid, remove dead copper, pour order 17): 0,12.7 47.5,12.7 47.5,3 0,3
+16V on Bottom Layer "+16V_L04_P016" (solid, remove dead copper, pour order 16): 3.9,17.5 42,17.5 42,9 3.9,9
PGND on Bottom Layer "PGND_L04_P018" (solid, remove dead copper, pour order 18): 27.9,8.9 18.2,8.9 18.2,7.8 18.3,7.9 27.9,7.9
PGND on Bottom Layer "PGND_L04_P019" (solid, remove dead copper, pour order 19): 16.1,9 4.8,9 4.8,7.7 15.9,7.7 16.1,7.9
GND on Top Layer "GND-TOP" (solid, remove dead copper, pour order 10): 0,25.5 0,50.6 47.5,50.6 47.5,25.5
PGND on Top Layer "PGND_L01_P011" (solid, remove dead copper, pour order 11): 0,3 0,22 47.5,22 47.5,3
NetJ2_1 on Top Layer "NETJ2_1_L01_P009" (solid, remove dead copper, pour order 9): 11.4,9.5 8,9.5 6.5,8 6.5,5 9.5,5 9.5,8.8 9.7,9 11.4,9
NetJ1_1 on Top Layer "NETJ1_1_L01_P000" (solid, remove dead copper, pour order 0): 11.792,9.5 15.292,9.5 16.792,8 16.792,5 13.592,5 13.592,8.9 11.792,8.9
NetJ3_1 on Top Layer "NETJ3_1_L01_P002" (solid, remove dead copper, pour order 2): 23.078,9.7 26.5,9.7 28.078,7.862 28.078,4.862 24.878,4.862 24.878,9.1 23.078,9.2
NetJ8_1 on Top Layer "NETJ8_1_L01_P003" (solid, remove dead copper, pour order 3): 34.1,9.4 37.8,9.4 39.3,7.9 39.3,4.9 36.1,4.9 36.1,8.8 34.1,8.9
NetJ11_1 on Top Layer "NETJ11_1_L01_P007" (solid, remove dead copper, pour order 7): 33.756,9.348 30.356,9.348 28.856,7.848 28.856,4.848 31.856,4.848 31.856,8.648 32.056,8.848 33.756,8.848
NetJ4_1 on Top Layer "NETJ4_1_L01_P008" (solid, remove dead copper, pour order 8): 22.85,9.65 19.45,9.65 17.95,8.15 17.95,4.9 20.95,4.9 20.95,8.95 21.15,9.15 22.85,9.15
GND on GND2 (split plane): 46.99,24.752 0.51,24.752 0.51,49.49 46.99,49.49
PGND on GND2 (split plane): 46.99,3.51 0.51,3.51 0.51,22.248 46.99,22.248
GND on GND (split plane): 46.99,24.752 0.51,24.752 0.51,49.49 46.99,49.49
PGND on GND (split plane): 46.99,3.51 0.51,3.51 0.51,22.248 46.99,22.248

## Other copper
GND (plane layer: these items are gaps in the copper):
  lines w0.254: 11.6,46.8 11.6,46.74 12.21,46.74 ; 20.6,46.9 20.6,46.84 20.77,46.84
  lines w2.5: 0.2,23.5 47.7,23.5
GND2 (plane layer: these items are gaps in the copper):
  lines w0.254: 11.6,46.8 11.6,46.74 12.21,46.74 ; 20.6,46.9 20.6,46.84 20.77,46.84
  lines w2.5: 0.2,23.5 47.7,23.5

## Silkscreen, mask and mechanical layers (free items; w line width, h text height)
Top Overlay:
  text "M1" at 7.554,44.654 h1
  text "M2" at 18.354,44.654 h1
  text "M3" at 30.554,44.554 h1
  text "USB" at 0.754,41.346 h1 r270
  text "Programmer" at 36.654,28.587 h1
  text "Teletupsud" at 1.254,26.887 h1
  text "2022" at 1.454,25.154 h1
  text "BAT+" at 43.146,14.754 h1 r90
  text "THROWER" at 1,11.4 h1
  text "BAT-" at 43.3,9.5 h1 r90
  text "M2" at 21.954,5.554 h1
  text "M1" at 10.854,5.454 h1
  text "M3" at 33.354,5.354 h1

## Text inside footprints (layer, text, board x,y; h text height)
J: Top 3D Body "PCB END" at 0.196,28.289 h0.41 r270